# Altium PCB STLINK.PcbDoc
Units mm, origin at the board's own origin, x right, y up, seen from the top; angles counter-clockwise.
Board outline 68 x 21 mm, 2 copper layers (Top Layer, Bottom Layer); 5 components, 7 nets, 50 pads, 0 vias.
Unrouted connection lines stored in the file: 1.
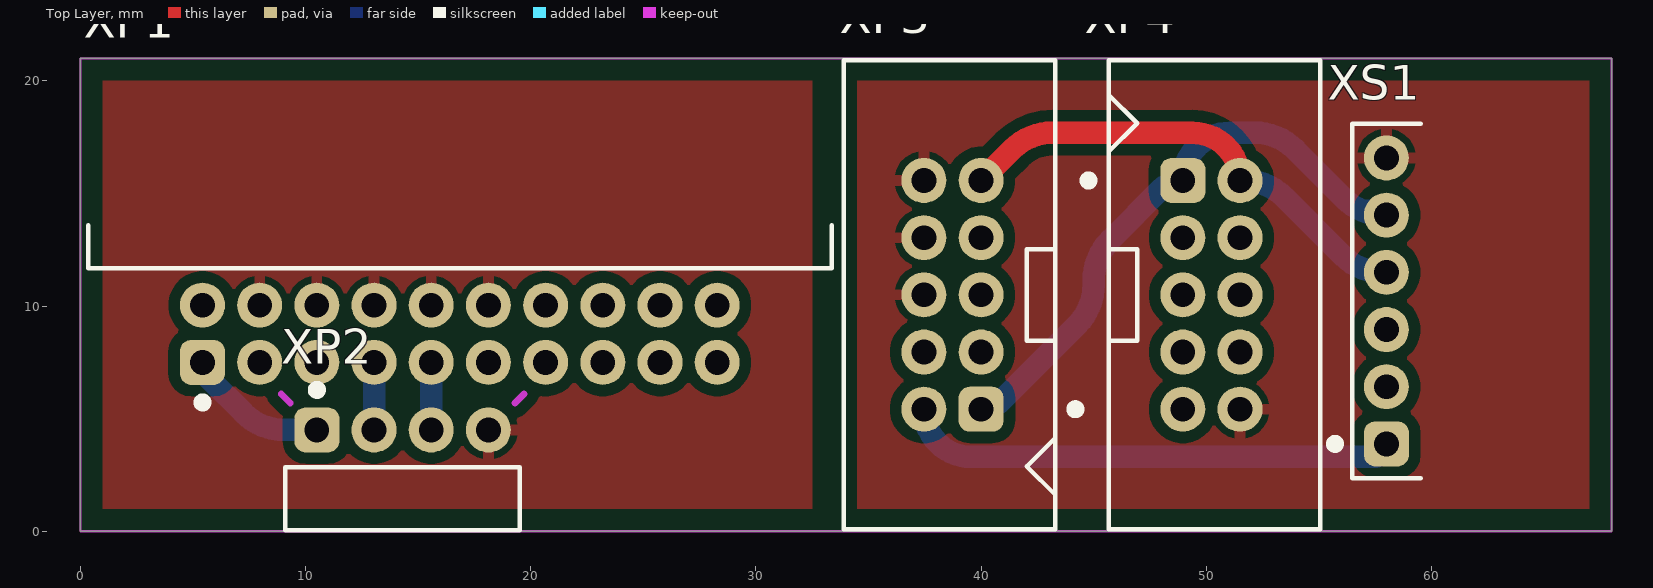
[diagram p0: Top Layer view]
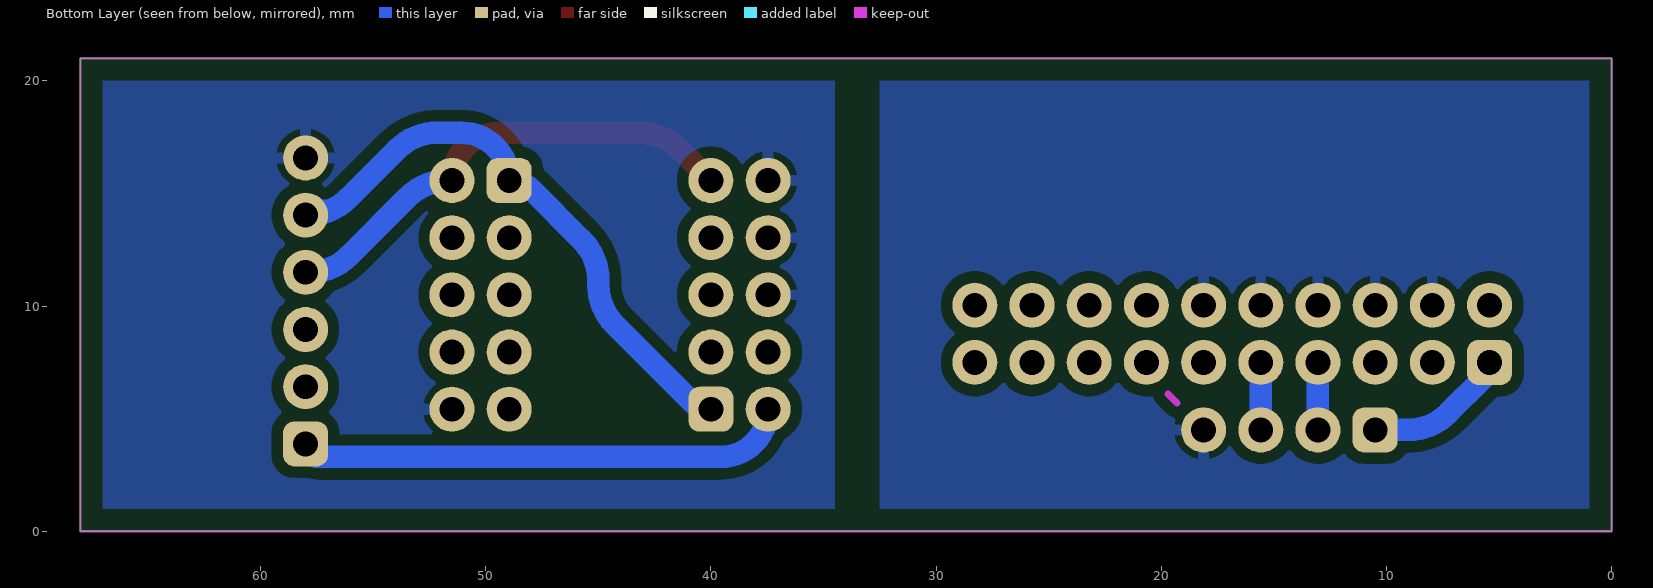
[diagram p1: Bottom Layer view, seen from below]

## Layer stack, top to bottom
Top Solder: solder mask 0.0102, Solder Resist, Dk 3.5
Top Layer: signal copper 0.0356
Dielectric 1: dielectric 0.32, FR-4, Dk 4.8
Bottom Layer: signal copper 0.0356
Bottom Solder: solder mask 0.0102, Solder Resist, Dk 3.5

## Board outline
0,0 68,0 68,21 0,21

## Design rules (kind name [scope] priority, off if disabled: settings)
Clearance [All] p1: gap=0.3 ignorepadtopadclearanceinfootprint=FALSE except(0: Arc-Hole Track-Hole SMDPad-Hole THPad-Hole Via-Hole Fill-Hole Poly-Hole Region-Hole Text-Hole; 0.5: Arc-Fill Arc-Poly Arc-Region Track-Fill Track-Poly Track-Region THPad-Fill THPad-Poly THPad-Region Fill-Fill Fill-Poly Fill-Region Poly-Poly Poly-Region Region-Region)
PlaneConnect [All] p1: planeconnectstyle=Relief reliefexpansion=0.5 reliefentries=4 reliefconductorwidth=0.3 reliefairgap=0.3
PolygonConnect [All] p1: connectstyle=Relief reliefconductorwidth=0.5 reliefentries=4 polygonreliefangle="90 Angle" airgapwidth=0.3
RoutingVias [All] p1: holewidth=0.711 width=1.27 viastyle="Through Hole" minholewidth=0.711 minwidth=1.27 maxholewidth=0.711 maxwidth=1.27
SolderMaskExpansion [All] p1: expansion=0.1 istentingtop=FALSE
Width [All] p1: maxlimit=2 minlimit=0.3 preferedwidth=0.5
29 further rules are at their usual default settings.

## Components (designator, comment, footprint, x,y, rotation, side; value= is the part's Value field where it differs from the comment)
XP1 "IDC-20MR" IDC-20MR 5.42,7.5 r0 top
XP2 "PLS-4R" PLS-4R-left 10.5,4.5 r0 top
XP3 "IDC-10MS" IDC-10MS 40,5.42 r90 top
XP4 "IDC-10MS" IDC-10MS 48.96,15.58 r270 top
XS1 "PBS-6R" PBS-6R-left 58,3.88 r90 top

## Footprints (in the part's own frame and the unit in brackets; to place one, negate y for a bottom-side part, rotate by r counter-clockwise, add the part's x,y. Pads: shape width x height; smd on the part's side, far side on the other; paste and mask are expansions set on the pad)
IDC-10MS [mm] "Box Header Pitch 2.54mm"
  rrect50% 2x2 hole 1.1: 1(0,0)
  round 2 hole 1.1: 2(0,2.54) 3(2.54,0) 4(2.54,2.54) 5(5.08,0) 6(5.08,2.54) 7(7.62,0) 8(7.62,2.54) 9(10.16,0) 10(10.16,2.54)
  silkscreen extent -5.33,-4.39 15.49,6.1, body extent -5.07,-3.01 15.23,5.84, height 9.33
IDC-20MR [mm] "Box Header R/A type Pitch 2.54mm"
  rrect50% 2x2 hole 1.1: 1(0,0)
  round 2 hole 1.1: 2(0,2.54) 3(2.54,0) 4(2.54,2.54) 5(5.08,0) 6(5.08,2.54) 7(7.62,0) 8(7.62,2.54) 9(10.16,0) 10(10.16,2.54) 11(12.7,0) 12(12.7,2.54) 13(15.24,0) 14(15.24,2.54) 15(17.78,0) 16(17.78,2.54) 17(20.32,0) 18(20.32,2.54) 19(22.86,0) 20(22.86,2.54)
  silkscreen extent -5.08,-1.98 27.94,6.1, body extent -5.07,-0.38 27.93,13.18, height 9.1
PBS-6R-left [mm] "Female Header R/A type Pitch 2.54mm"
  rrect50% 2x2 hole 1.1: 1(0,0)
  round 2 hole 1.1: 2(2.54,0) 3(5.08,0) 4(7.62,0) 5(10.16,0) 6(12.7,0)
  silkscreen extent -1.52,-1.52 14.22,2.49, body extent -1.27,-10.07 13.97,0.13, height 2.64
PLS-4R-left [mm] "Pin Header R/A type Pitch 2.54mm"
  rrect50% 2x2 hole 1.1: 1(0,0)
  round 2 hole 1.1: 2(2.54,0) 3(5.08,0) 4(7.62,0)
  silkscreen extent -1.4,-4.44 9.02,1.98, body extent -1.27,-10.04 8.89,0.32, height 2.5

## Part data
XP1: "Box Header R/A type Pitch 2.54mm", Circuit1=VTRef, Circuit2=NC, Circuit3="Not used", Circuit4=GND, Circuit5="Not used", Circuit6=GND, Circuit7=SWDIO, Circuit8=GND, Circuit9=SWCLK, Circuit10=GND, Circuit11="Not used", Circuit12=GND, Circuit13=SWO, Circuit15=RESET, Circuit17="Not used", Circuit19=5V-Supply, Label="\"ST-LINK V2\""
XP2: "Pin Header R/A type Pitch 2.54mm", Circuit1=+3.3V, Circuit2=SWDIO, Circuit3=SWCLK, Circuit4=GND, Label="\"SWD\""
XP3 XP4: "Box Header Pitch 2.54mm", Circuit10=GND, Label="\"Label\""
  XP3: Circuit1=RX, Circuit2=+5V, Circuit3=NC, Circuit4=NC, Circuit5=TXE, Circuit6=GND, Circuit7=MX, Circuit8=GND, Circuit9=TX
  XP4: Circuit1=CH0, Circuit2=CH1, Circuit3=CH2, Circuit4=CH3, Circuit5=CH4, Circuit6=CH5, Circuit7=CH6, Circuit8=CH7, Circuit9=GND
XS1: "Female Header R/A type Pitch 2.54mm", Circuit1=5V, Circuit2=VCC, Circuit3=3V3, Circuit4=TXD, Circuit5=RXD, Circuit6=GND, Label="\"UART\""

## Nets (pads, with @x,y where several pads share a name; then routed paths per layer and width w, separated by ;. In a path a pad name is that pad's centre, name@x,y a point inside that pad or via, vN(x,y) a via of type N, cw(c..) or ccw(c..) an arc to the next point about the centre after c; other vN are vias at no path point)
GND: XP1.4 XP1.6 XP1.8 XP1.10 XP1.12 XP2.4 XP3.6 XP3.8 XP3.10 XP4.10 XS1.6
NetXP1_1: XP1.1 XP2.1 | length 6.4
  Bottom Layer w1: XP1.1 ccw(c6.434,7.5) 5.717,6.783 7.256,5.244 ccw(c9.052,7.04) 9.052,4.5 XP2.1
NetXP1_7: XP1.7 XP2.2 | length 3
  Bottom Layer w1: XP2.2 XP1.7
NetXP1_9: XP1.9 XP2.3 | length 3
  Bottom Layer w1: XP2.3 XP1.9
NetXP3_1: XP3.1 XP4.1 XS1.5 | length 26.9
  Bottom Layer w1: XP3.1 ccw(c40,6.675) 40.888,5.788 44.256,9.156 ccw(c42.46,10.952) 45,10.952 45,11.148 cw(c47.54,11.148) 45.744,12.944 47.97,15.17 cw(c48.96,14.18) XP4.1 cw(c51.08,15.58) 51.08,17.7 52.148,17.7 cw(c52.148,15.16) 53.944,16.956 56.116,14.784 ccw(c57.912,16.58) 56.945,14.231 ; 56.945,14.231 ccw(c57.912,16.58) 57.912,14.04 XS1.5 57.809,14.231 56.945,14.231
NetXP3_2: XP3.2 XS1.1 | length 22.1
  Bottom Layer w1: XP3.2 ccw(c39.58,5.42) 39.58,3.3 57.42,3.3 ccw(c57.42,3.88) XS1.1
NetXP3_9: XP3.9 XP4.2 XS1.4 | length 21.5
  Top Layer w1: XP3.9 41.376,16.956 cw(c43.172,15.16) 43.172,17.7 49.38,17.7 cw(c49.38,15.58) 51.499,15.655 cw(c49.38,15.58) XP4.2
  Bottom Layer w1: XP4.2 51.668,15.58 cw(c51.668,13.04) 52.549,15.422 cw(c51.668,13.04) 53.464,14.836 56.056,12.244 ccw(c57.852,14.04) 56.944,11.668 ccw(c57.852,14.04) 57.852,11.5 XS1.4
pads on no net: XP1.2 XP1.3 XP1.5 XP1.11 XP1.13 XP1.14 XP1.15 XP1.16 XP1.17 XP1.18 XP1.19 XP1.20 XP3.3 XP3.4 XP3.5 XP3.7 XP4.3 XP4.4 XP4.5 XP4.6 XP4.7 XP4.8 XP4.9 XS1.2 XS1.3

## Polygon pours and split planes (outlines as drawn)
GND on Top Layer "NONET_L02_P-001" (solid, remove dead copper, pour order 0): 34.5,1 34.5,20 67,20 67,1
GND on Top Layer "NONET_L02_P-001" (solid, remove dead copper, pour order 3): 1,1 1,20 32.5,20 32.5,1
GND on Bottom Layer "NONET_L02_P-001" (solid, remove dead copper, pour order 1): 34.5,1 34.5,20 67,20 67,1
GND on Bottom Layer "NONET_L02_P-001" (solid, remove dead copper, pour order 2): 1,1 1,20 32.5,20 32.5,1

## Keep-outs
Top Layer:
  lines w0.3: 8.92,6.1 9.32,5.7 ; 19.3,5.7 19.7,6.1
Bottom Layer:
  lines w0.3: 19.3,5.7 19.7,6.1
Keep-Out Layer:
  the board outline again, w0.1